# EAGLE board 1-voice(3_3) (EAGLE 9.2.1)
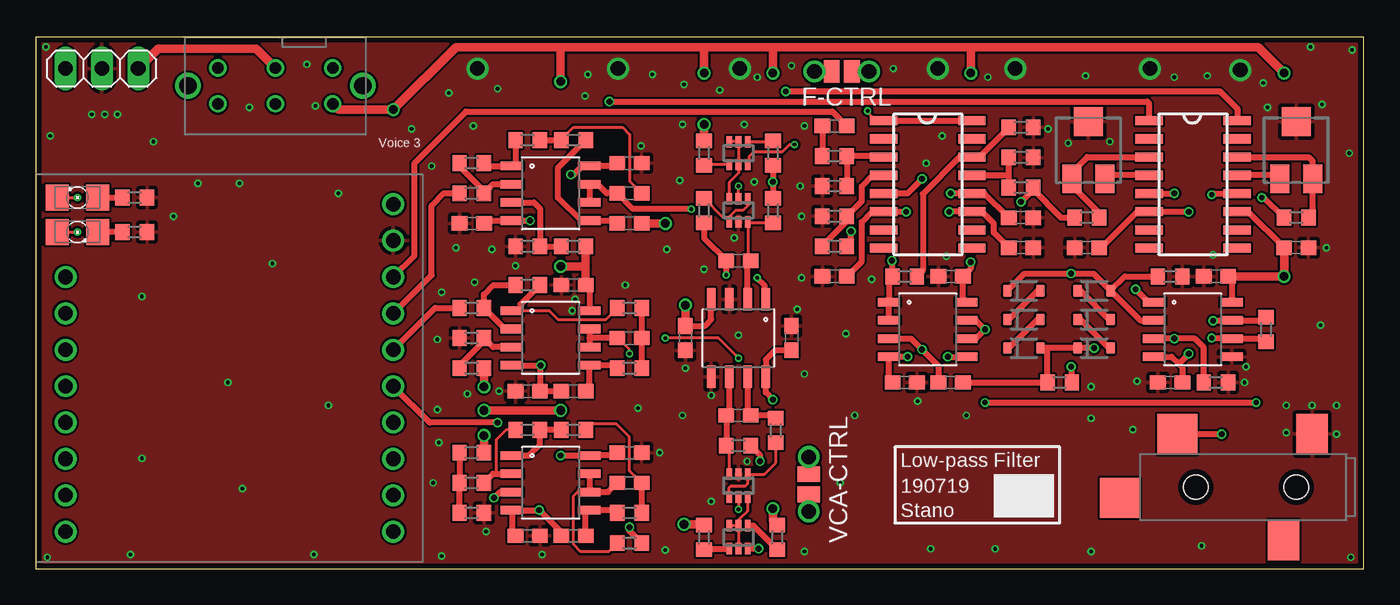
[diagram p0: board, top side]
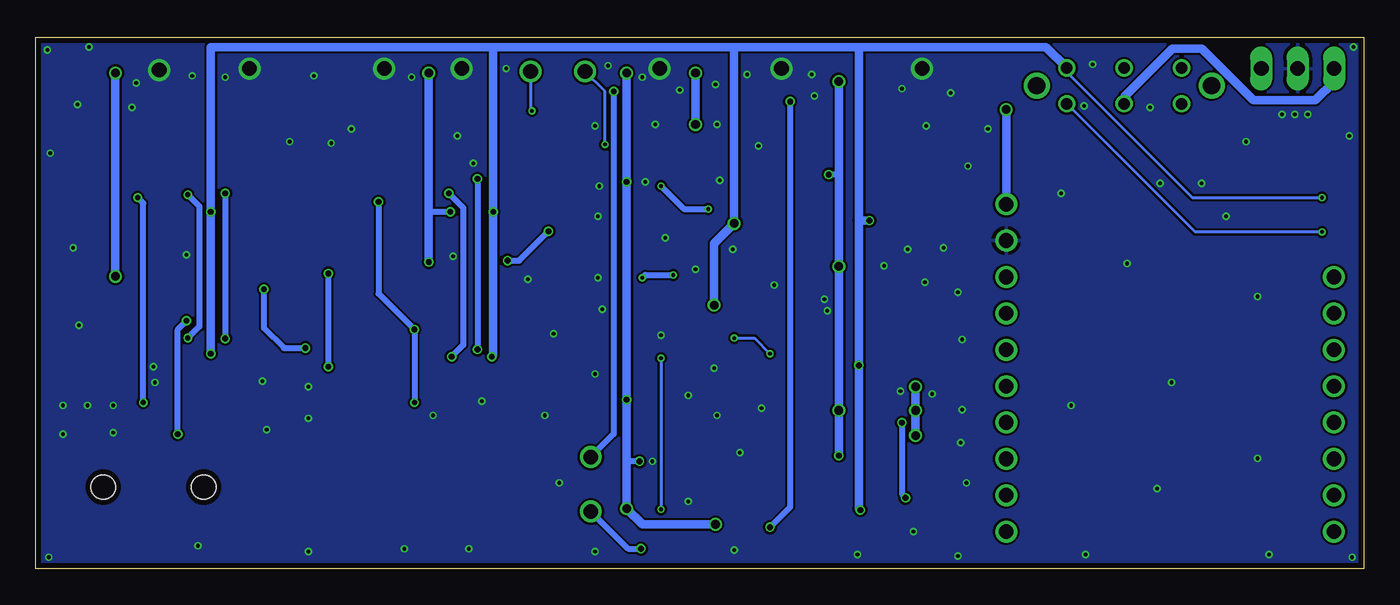
[diagram p1: board, bottom side, seen from below]

Size 92.6 x 37.1 mm. Coordinates in mm from the lower left corner, seen from the top.
Outline: 92.6,37.1 0,37.1 0,0 92.6,0 92.6,37.1
Copper layers (1*16): Top 0.035559375mm / dielectric 1.6mm / Bottom 0.035559375mm
Design rules "oshpark-2layer *": minimum track width 6mil, minimum drill 10mil, track to track 6mil, track to pad 6mil, pad to pad 6mil, via to via 6mil, smd to smd 6mil, copper to edge 15mil, drill to drill 6mil, minimum pad ring 5mil, minimum via ring 5mil, stop-mask expansion 2.5mil, vias tented up to drill 0.6mm, thermal gap 10mil

## Footprints (pad centres in the part's own frame; a part is rotated, then mirrored left to right if it is on the bottom)
C0603 = smd 1.1 x 1: 1 -0.85,0; 2 0.85,0
SOD-323 = smd 0.63 x 0.83: 1 -1.15,0; 2 1.15,0
1X03 = drill 1.016 long: 1 -2.54,0; 2 0,0; 3 2.54,0
TRS = smd 2.2 x 2.8: P$1 2.4,-3.7; P$3 4.4,3.7 | smd 2.8 x 2.8: P$2 11.8,-3.7; P$4 15.8,0.75 | hole 1.7: 3.5,0; 10.5,0
1206 = smd 1.6 x 1.803: A -1.422,0; C 1.422,0
SOT-363-JBLMASK = smd 0.4 x 0.8: 1 -0.65,-0.8; 2 0,-0.8; 3 0.65,-0.8; 4 0.65,0.8; 5 0,0.8; 6 -0.65,0.8
R0603 = smd 1 x 1.1: 1 -0.85,0; 2 0.85,0
DPDT = drill 0.8: P$1 -4,-1.25; P$2 0,-1.25; P$3 4,-1.25; P$4 -4,1.25; P$5 0,1.25; P$6 4,1.25 | drill 1.2: P$7 -6.1,0; P$8 6.1,0
SOIC8 = smd 0.6 x 1.55: P$1 -1.905,-2.7; P$2 -0.635,-2.7; P$3 0.635,-2.7; P$4 1.905,-2.7; P$5 1.905,2.7; P$6 0.635,2.7; P$7 -0.635,2.7; P$8 -1.905,2.7
DMP16 = smd 1.91 x 0.64: 1 -6.47,9.145; 2 -6.47,7.875; 3 -6.47,6.605; 4 -6.47,5.335; 5 -6.47,4.065; 6 -6.47,2.795; 7 -6.47,1.525; 8 -6.47,0.255; 9 -0.33,0.255; 10 -0.33,1.525; 11 -0.33,2.795; 12 -0.33,4.065; 13 -0.33,5.335; 14 -0.33,6.605; 15 -0.33,7.875; 16 -0.33,9.145
CV_MODULE = drill 1.02: CV1-1 2.07,7.17; CV1-2 2.07,17.32; CV1-3 24.93,7.17; CV1-4 24.93,17.32; CV2-1 2.07,4.63; CV2-2 2.07,14.78; CV2-3 24.93,4.63; CV2-4 24.93,14.78; CV3-1 2.07,2.09; CV3-2 2.07,12.24; CV3-3 24.93,2.09; CV3-4 24.93,12.24; GND 24.93,22.4; OSC-1 2.07,9.71; OSC-2 2.07,19.86; OSC-3 24.93,9.71; OSC-4 24.93,19.86; VCC 24.93,24.94
CURRENT_TESTPOINT = drill 1.02: P1 -1.9,0; P2 1.9,0 | smd 1.1 x 1.6: P1.1 -0.705,0; P2.1 0.705,0
POT-TRIM-SMD-BOURNS-3314 = smd 1.3 x 2: 1 -1.15,2; 3 1.15,2 | smd 2 x 2: 2 0,-2

## Placement (x,y rotation side)
C1  10p  [C0603]  49,10.7 0 top
C2  10u  [C0603]  55.7,30.9 180 top
C3  1000p  [C0603]  37.5,12.4 180 top
C4  2000p  [C0603]  41.4,16.1 180 top
C5  0.1u  [C0603]  82.3,20.4 0 top
C6  0.1u  [C0603]  79.1,13 180 top
C7  0.1u  [C0603]  34.3,12.4 180 top
C8  0.1u  [C0603]  37.5,19.8 0 top
C18  0.1u  [C0603]  52.7,16.1 270 top
C19  0.1u  [C0603]  45.3,16.1 270 top
C20  10p  [C0603]  49,21.5 180 top
C23  1000p  [C0603]  41.4,24.1 0 top
C24  2000p  [C0603]  41.4,26.2 180 top
C25  0.1u  [C0603]  41.4,28.3 180 top
C26  0.1u  [C0603]  30.4,24.1 180 top
C27  2000p  [C0603]  41.4,6 180 top
C28  1000p  [C0603]  37.5,2.3 180 top
C29  0.1u  [C0603]  87.9,22.4 0 top
C30  0.1u  [C0603]  73.3,22.4 0 top
C31  0.1u  [C0603]  41.4,8.1 180 top
C32  0.1u  [C0603]  34.3,2.3 0 top
C33  0.1u  [C0603]  63.8,20.4 180 top
C34  0.1u  [C0603]  60.6,13 180 top
C35  2000p  [C0603]  63.8,13 0 top
C36  2000p  [C0603]  68.7,24.5 0 top
C37  0.1u  [C0603]  68.7,22.4 0 top
C38  0.1u  [C0603]  55.7,20.4 0 top
D1  1N4148  [SOD-323]  73.8,19.4 0 top
D2  1N4148  [SOD-323]  73.8,17.4 0 top
D3  1N4148  [SOD-323]  73.8,15.4 0 top
D4  1N4148  [SOD-323]  68.9,15.4 0 top
D5  1N4148  [SOD-323]  68.9,17.4 0 top
D6  1N4148  [SOD-323]  68.9,19.4 0 top
JP2  [1X03]  4.6,34.9 180 top
JP7  TRS  [TRS]  91.4,5.7 180 top
LED1  BLUE  [1206]  2.9,23.5 0 top
LED3  YELLOW  [1206]  2.9,25.9 180 top
Q1  BC847BS  [SOT-363-JBLMASK]  49,25 180 top
Q2  BC857BS  [SOT-363-JBLMASK]  49,29 180 top
Q3  BC847BS  [SOT-363-JBLMASK]  49,5.8 180 top
Q4  BC857BS  [SOT-363-JBLMASK]  49,2.2 180 top
R1  3.3k  [R0603]  85.8,16.7 270 top
R2  30k  [R0603]  87.9,24.5 0 top
R3  10k  [R0603]  41.4,14 180 top
R4  10k  [R0603]  41.4,18.2 0 top
R5  10k  [R0603]  34.3,19.8 180 top
R6  165k  [R0603]  30.4,18.2 180 top
R8  1k  [R0603]  46.6,25 90 top
R9  280k  [R0603]  51.4,25 90 top
R10  10k  [R0603]  30.4,28.3 180 top
R11  10k  [R0603]  37.5,29.9 0 top
R12  10k  [R0603]  34.3,29.9 0 top
R13  165k  [R0603]  30.4,26.2 180 top
R14  1k  [R0603]  51.6,9.65 270 top
R15  562  [R0603]  34.3,22.5 180 top
R16  72k  [R0603]  37.5,22.5 180 top
R17  562  [R0603]  30.4,16.1 180 top
R18  72k  [R0603]  30.4,14 180 top
R19  100k  [R0603]  6.9,23.5 180 top
R21  10k  [R0603]  6.9,25.9 180 top
R23  10  [R0603]  46.6,29 90 top
R24  10  [R0603]  51.4,29 270 top
R25  30k  [R0603]  73.3,24.5 180 top
R26  10k  [R0603]  55.7,28.8 0 top
R27  220  [R0603]  55.7,26.7 0 top
R28  562k  [R0603]  49,8.6 0 top
R29  10k  [R0603]  55.7,22.5 0 top
R30  220  [R0603]  55.7,24.6 180 top
R31  10  [R0603]  46.6,2.2 90 top
R32  220  [R0603]  68.7,30.8 0 top
R33  10k  [R0603]  60.6,20.4 0 top
R34  220  [R0603]  68.7,28.7 0 top
R35  10k  [R0603]  68.7,26.6 0 top
R36  3.3k  [R0603]  82.3,13 180 top
R37  10k  [R0603]  71.4,13 180 top
R38  3.3k  [R0603]  79.1,20.4 180 top
R39  100k  [R0603]  34.3,9.7 0 top
R40  14.7k  [R0603]  30.4,6 0 top
R41  1.62k  [R0603]  30.4,3.9 180 top
R42  8.45k  [R0603]  30.4,8.1 0 top
R43  10k  [R0603]  37.5,9.7 0 top
R44  10k  [R0603]  41.4,3.9 180 top
R45  30k  [R0603]  41.4,1.8 180 top
R46  10  [R0603]  51.7,2.2 90 top
SW1  SWITCH-DPDT  [DPDT]  16.7,33.7 180 top
U4  TL072  [SOIC8]  35.9,26.2 270 top
U5  TL072  [SOIC8]  35.9,6 270 top
U6  LM13700  [DMP16]  65.61,22.12 0 top
U7  TL072  [SOIC8]  62.2,16.7 270 top
U8  LM13700  [DMP16]  84.1,22.12 0 top
U9  TL072  [SOIC8]  49,16.1 180 top
U10  TL072  [SOIC8]  35.9,16.1 270 top
U11  TL072  [SOIC8]  80.69,16.7 270 top
U$1  CV_MODULE  [CV_MODULE]  0,0.5 0 top
U$2  CURRENT_TESTPOINT  [CURRENT_TESTPOINT]  56.2,34.7 180 top
U$3  CURRENT_TESTPOINT  [CURRENT_TESTPOINT]  53.9,5.9 270 top
VR1  1k  [POT-TRIM-SMD-BOURNS-3314]  73.4,29.2 180 top
VR2  1k  [POT-TRIM-SMD-BOURNS-3314]  87.9,29.2 180 top

## Library data of the parts
C1-C8 C18-C20 C23-C38 = rcl; SPICEPREFIX: C
D1-D6 U6 U8 VR1 VR2 = LITTLEBITS
JP2 = pinhead
JP7 SW1 U4 U5 U7 U10 U$1-U$3 = synth
LED1 LED3 = led
Q1-Q4 = LITTLEBITS; SPICEPREFIX: Q
R1-R6 R8-R19 R21 R23-R46 = rcl; SPICEPREFIX: R
U9 U11 = synth; SPICEPREFIX: U

## Nets
12V-IN: JP2.3 SW1.P$5
+12V: C5.2 C8.2 C18.2 C25.2 C29.1 C31.2 C33.1 C37.1 LED1.A R9.2 R16.1 R18.1 R23.2 R24.2 R28.2 R31.2 R42.2 R46.2 SW1.P$4 U4.P$8 U5.P$8 U6.11 U7.P$8 U8.11 U9.P$8 U10.P$8 U11.P$8 U$1.VCC
-12V: C3.2 C6.1 C7.1 C19.1 C23.2 C26.1 C28.2 C30.2 C32.1 C34.2 C38.2 LED3.C SW1.P$1 U4.P$4 U5.P$4 U6.6 U7.P$4 U8.6 U9.P$4 U10.P$4 U11.P$4
-12V-IN: JP2.1 SW1.P$2
F0-OUT: R2.1 R25.2 R35.2 U7.P$6 U7.P$7
F-CTRL0: R13.2 U$1.CV1-4
F-CTRL0-EXP: U6.1 U6.16 U$2.P1 U$2.P1.1
F-CTRL0-LIN: C24.2 Q1.2 U4.P$6 U4.P$7
FILT_IN: C2.2 R26.1
GND: C5.1 C6.2 C7.2 C8.1 C18.1 C19.2 C25.1 C26.2 C29.2 C30.1 C31.1 C32.2 C33.2 C34.1 C36.2 C37.2 C38.1 JP2.2 JP7.P$1 Q1.5 Q3.2 R15.2 R17.2 R19.1 R21.1 R27.1 R30.2 R32.2 R34.2 R36.1 R38.1 R41.1 U9.P$3 U9.P$5 U11.P$5 U$1.GND VR1.2 VR2.2
N$1: R10.2 R13.1 U4.P$2
N$2: R1.2 U8.12 U11.P$6
N$3: R2.2 U8.14 VR2.1
N$4: C3.1 R3.2 U10.P$5
N$5: C4.1 R3.1 R4.2
N$6: R4.1 R5.1 U10.P$1
N$7: Q2.6 U$2.P2 U$2.P2.1
N$8: Q4.6 U$3.P2 U$3.P2.1
N$9: Q1.1 Q1.4 R8.2
N$10: C20.2 R8.1 U9.P$1
N$11: C20.1 Q1.6 R9.1 U9.P$2
N$12: C23.1 R11.2 U4.P$5
N$13: Q1.3 Q2.2 Q2.3 Q2.5
N$14: C24.1 R11.1 R12.2
N$15: R10.1 R12.1 U4.P$1
N$16: Q3.1 Q3.4 R14.2
N$17: LED1.C R19.2
N$19: R5.2 R6.1 U10.P$2
N$20: R15.1 R16.2 U4.P$3
N$21: LED3.A R21.2
N$23: Q2.4 R23.1
N$24: Q2.1 R24.1
N$25: C36.1 U6.12 U7.P$5
N$27: R26.2 R27.2 U6.3
N$28: C35.1 U6.5 U7.P$3
N$29: R36.2 U8.5 U11.P$3
N$30: U8.4 VR1.1
N$31: R29.1 R30.1 U6.4
N$32: D1.2 D6.1 R37.1 R38.2 U11.P$2
N$33: C1.2 R14.1 U9.P$7
N$34: C35.2 D3.1 D4.2 R37.2 U11.P$1
N$35: R32.1 R33.2 U6.14
N$36: R34.1 R35.1 U6.13
N$37: D2.1 D3.2
N$38: D1.1 D2.2
N$39: D4.1 D5.2
N$40: D5.1 D6.2
N$41: R40.1 R41.2 R42.1
N$42: R39.1 R40.2 U5.P$2
N$43: R39.2 R43.1 U5.P$1
N$44: C27.1 R43.2 R44.1
N$45: C28.1 R44.2 U5.P$5
N$46: R45.1 U8.1
N$47: U8.13 VR2.3
N$48: C1.1 Q3.3 R28.1 U9.P$6
N$49: R29.2 R33.1 U7.P$1 U7.P$2
N$50: R17.1 R18.2 U10.P$3
N$51: Q3.6 Q4.2 Q4.3 Q4.5
N$53: Q4.4 R31.1
N$54: Q4.1 R46.1
N$55: R25.1 U8.3 VR1.3
OSC0-OUT: C2.1 U$1.OSC-4
Q-CTRL0: U5.P$3 U$1.CV3-4
Q-CTRL0-I: C27.2 R45.2 U5.P$6 U5.P$7
VCA0-EXP: U8.16 U$3.P1 U$3.P1.1
VCA0-LP: C4.2 Q3.5 U10.P$6 U10.P$7
VCA-CTRL0: R6.2 U$1.CV2-4
VCA-OUT0: JP7.P$2 R1.1 U11.P$7

## Tracks (layer width: path | path; a pad name or v marks a point on that pad's centre or on a via)
12V-IN
  Bottom 0.61: JP2.3 2.06,34 3.36,32.7 7.68,32.7 11.28,36.3 13.35,36.3 16.7,32.95 SW1.P$5
+12V  (via drill 0.25, 0.4, 0.6)
  Top 0.203: LED1.A v2.9,23.5
  Top 0.406: C37.1 66.8,23.45 66.8,24.1 65.98,24.91 U6.11 63.72,24.91 v63.7,24.9 | C5.2 83.39,20.16 U11.P$8 | U7.P$8 64.65,18.86 C33.1 65.2,20.95 v65.2,21.4 | C25.2 40.35,28.11 U4.P$8 38.1,28.11 37.5,27.5 v37.3,27.5 | C31.2 40.16,7.91 U5.P$8 v36.6,7.9 | U8.11 84.53,24.91 C29.1 | C8.2 38.6,19.55 U10.P$8 | R24.2 v51.4,27 R9.2 | v51.4,11.8 50.91,12.29 U9.P$8 50.91,14.61 51.55,15.25 C18.2 | R28.2 50.5,7.95 v50.5,7.5
  Top 0.61: 36.6,36.4 46.6,36.4 | 46.6,36.4 51.4,36.4 | 51.4,36.4 65.2,36.4 | SW1.P$4 21.11,32.04 v24.93,32.04 29.29,36.4 36.6,36.4 | 36.6,36.4 v36.6,34 | v36.6,21.1 38.35,21.1 | 38.35,21.1 R16.1 | C8.2 38.35,21.1 | R18.1 v31.25,12.7 | v31.25,9.3 R42.2 | v31.25,11.05 v36.6,11.05 | 51.4,36.4 v51.4,34.59 | v51.4,4.2 51.4,3.35 R46.2 | R31.2 46.55,3.1 v45.2,3.1 | 46.6,36.4 v46.6,34.59 | v46.6,31 R23.2 | 65.2,36.4 v65.2,34.59 | 65.2,36.4 85.24,36.4 v87.05,34.59 | C29.1 v87.05,20.4 C5.2
  Bottom 0.203: v2.9,23.5 11.75,23.5 SW1.P$4
  Bottom 0.406: v50.5,7.5 51.4,7.5 | 36.6,27.4 36.7,27.5 v37.3,27.5 | v63.7,24.9 65.2,24.9
  Bottom 0.61: v36.6,34 36.6,27.4 v36.6,21.1 v36.6,11.05 v36.6,7.9 | U$1.VCC v24.93,32.04 | v31.25,12.7 v31.25,11.05 v31.25,9.3 | v51.4,34.59 v51.4,27 v51.4,11.8 51.4,7.5 v51.4,4.2 50.3,3.1 v45.2,3.1 | v46.6,34.59 v46.6,31 | v65.2,34.59 65.2,24.9 v65.2,21.4 | v87.05,34.59 v87.05,20.4
-12V  (via drill 0.25, 0.4, 0.6)
  Top 0.203: LED3.C v2.9,25.9
  Top 0.406: C38.2 57.6,21.45 57.6,24.2 58.31,24.91 U6.6 60.69,24.91 v60.7,24.9 | U11.P$4 79.2,14.79 79.7,14.3 | C6.1 79.95,14.05 79.7,14.3 | C34.2 59.5,13.25 U7.P$4 v60.8,14.8 | C30.2 74.3,22.4 76.81,24.91 U8.6 80.39,24.91 v80.4,24.9 | C26.1 31.45,24.3 U4.P$4 v34.46,24.3 v34.47,24.3 | C32.1 33.2,2.55 U5.P$4 v35.09,4.09 v35.1,4.1 36.65,2.55 C28.2 | U10.P$4 v35.2,14.2 35.15,14.14 C7.1 C3.2 | C19.1 46.65,16.95 47.09,17.39 U9.P$4 | v80.4,15 79.7,14.3
  Top 0.61: v45.3,18.4 C19.1 | C23.2 v43.9,24.1
  Bottom 0.203: v2.9,25.9 11.95,25.9 20.7,34.65 SW1.P$1
  Bottom 0.406: v35.2,14.2
  Bottom 0.61: SW1.P$1 22.15,36.4 35.2,36.4 | v35.1,4.1 35.2,4.2 v35.2,14.2 35.2,24.3 | 35.2,36.4 43.9,36.4 | 43.9,36.4 60.7,36.4 | 43.9,36.4 v43.9,24.1 45.3,22.7 v45.3,18.4 | 35.2,36.4 35.2,24.3 | v34.47,24.3 35.2,24.3 | 60.7,36.4 v60.7,24.9 60.7,14.9 v60.8,14.8 | 60.7,36.4 80.4,36.4 v80.4,24.9 v80.4,15
-12V-IN
  Top 0.61: JP2.1 8.54,36.3 15.35,36.3 SW1.P$2
F0-OUT  (via drill 0.35, 0.4)
  Top 0.406: v68.7,25.6 69.55,26.45 | 69.55,26.45 R35.2 | 69.55,26.45 71.5,24.5 R25.2 | v66.2,11.6 v85.1,11.6 | R2.1 85.65,25.9 v85.5,25.9 | U7.P$7 65.56,17.34 v66.2,16.7 65.56,16.07 U7.P$6
  Bottom 0.406: v68.7,25.6 68.7,19.2 v66.2,16.7 v66.2,11.6 | v85.1,11.6 85.1,25.5 v85.5,25.9
F-CTRL0
  Top 0.406: R13.2 28.45,26.2 27.6,25.35 27.6,20.49 U$1.CV1-4
F-CTRL0-EXP  (via drill 0.25)
  Top 0.203: U6.1 58.6,31.27 58,31.86 v58,31.95
  Top 0.406: U6.1 U6.16
  Bottom 0.203: U$2.P1 58.1,32.05 v58,31.95
F-CTRL0-LIN  (via drill 0.25)
  Top 0.203: Q1.2 v49,26.7
  Top 0.406: U4.P$6 U4.P$7 38.66,26.9 39.1,26.9 39.8,26.2 C24.2 41.65,25.1 v45.7,25.1
  Bottom 0.406: v49,26.7 47.4,25.1 v45.7,25.1
FILT_IN
  Top 0.406: C2.2 R26.1
GND  (via drill 0.25, 1.02)
  other vias: 37.6,18.8 37.4,18 0.7,36.4 1,30.2 7.4,19 7.4,7.7 14.4,5.6 13.4,13 16.5,21.3 21.1,26.2 20.4,11.4 0.8,0.8 6.6,1 19.4,1 28.3,0.9 35.3,1 31.4,2.6 27.7,6 28.1,8.8 28,11.1 30.1,12.2 32.3,12.4 28,16 28.3,19.3 30.6,20 29.3,22.4 31.8,22.3 33.45,21.15 43.9,1.3 47.1,4.7 43.5,8.1 42,11.2 45.1,10.7 47.1,12.1 45.3,14 41.1,19.8 44,22.3 46.6,20.9 44.9,27.1 42.2,29.5 45.1,31 30.5,30.9 27.6,28.1 26.2,30.7 3.9,31.7 4.8,31.7 5.7,31.7 38.5,34.5 28.8,33.2 32.2,33.5 38.3,33 43,34.5 49,16.3 49.6,7.5 49.4,31 50.1,27 53.6,30.9 53.3,26.7 48.7,23.1 53.4,24.6 53.4,20.3 53.1,18.1 56.5,16.4 53.6,13.6 56.1,6 53.6,1.2 57.1,10.7 62.4,1.4 73.6,10.5 61.5,11.7 64.9,10.7 66.9,1.4 45.2,33.8 47.7,33.4 50.3,34.3 52.7,35.1 59.8,34.9 66.4,34.3 58.3,20.2 63.2,30.2 62.1,28.3 63.5,21.8 73.2,34.4 79.4,34.3 81.7,34.4 85.6,33.9 85.9,32.2 89.7,32.4 88.9,36.4 91.8,36.2 91.6,29 90,22.4 82.1,21.9 89.6,17 90.7,11.4 90.7,9.4 89,11.4 87.2,11.4 87.2,9.5 81.3,1.6 91.7,0.8 73.6,1.2 76.5,9.7 73.6,12.7 76.8,13.1 84.3,13 84.4,14.1 72,29.7 74.9,29.8 70.6,30.7 8.2,29.8 11.3,26.9 14.9,32.2 18.9,35.2 9.6,24.6 14.2,26.9 19.5,32.3 30.8,34.9 40.6,34.9 49.1,34.9 62.9,34.9 68.3,34.9 77.7,34.9 84,34.8
  pour Top: 0,0 0,37.1 92.6,37.1 92.6,0
  pour Bottom: 0,0 0,37.1 92.6,37.1 92.6,0
N$1
  Top 0.406: R13.1 31.32,26.27 | 31.32,26.27 31.89,26.84 U4.P$2 | R10.2 29.55,28.05 31.32,26.27
N$2  (via drill 0.35)
  Top 0.406: R1.2 85.58,16.07 U11.P$6 82.03,16.07 v82,16.1 | v82,26.1 82.08,26.18 U8.12
  Bottom 0.406: v82,16.1 81.2,16.9 81.2,25.3 v82,26.1
N$3
  Top 0.406: U8.14 83.8,28.7 88.8,28.7 89.05,28.45 VR2.1 89.05,24.8 R2.2
N$4
  Top 0.406: R3.2 40.16,14.2 U10.P$5 38.6,12.65 C3.1
N$5
  Top 0.406: R3.1 C4.1 R4.2
N$6
  Top 0.203: U10.P$1 33.8,18 35.8,18 36.41,17.4 39.75,17.4 R4.1
  Top 0.406: R5.1 33.8,18.45 33.8,18
N$7  (via drill 0.25)
  Top 0.203: Q2.6 49.75,28.3 49.75,28.75 50.1,29.1 52.05,29.1 52.56,29.6 v52.91,29.6 | U$2.P2 U$2.P2.1
  Bottom 0.203: v52.91,29.6 52.91,33.31 U$2.P2
N$8  (via drill 0.4)
  Top 0.203: U$3.P2 U$3.P2.1
  Top 0.406: v50.4,1.4 Q4.6
  Bottom 0.406: U$3.P2 51.3,1.4 v50.4,1.4
N$9
  Top 0.203: Q1.4 48.35,24.55 | 48.35,24.55 48.8,25 49.3,25 49.65,25.35 Q1.1 | R8.2 47.9,24.55 48.35,24.55
N$10  (via drill 0.25)
  Top 0.406: R8.1 46.6,23.05 C20.2 v48.15,20.5 | U9.P$1 50.8,18.9 50.8,19.8 v50.3,20.3
  Bottom 0.406: v50.3,20.3 50.1,20.5 v48.15,20.5
N$11
  Top 0.203: R9.1 49.7,24.15 Q1.6 49.65,21.7 C20.1
  Top 0.406: U9.P$2 49.63,21.29 C20.1
N$12
  Top 0.406: R11.2 36.4,27.95 36.4,25.9 38.01,24.3 U4.P$5 40.35,24.3 C23.1
N$13
  Top 0.203: Q2.3 Q2.2 Q2.5 49,27.6 48.35,26.95 Q1.3
N$14
  Top 0.203: R11.1 36.65,29.95 37.5,30.8 40.9,30.8 41.4,30.3 41.4,27.05 C24.1
  Top 0.406: R12.2 R11.1
N$15
  Top 0.406: R12.1 33.45,28.11 U4.P$1 31.45,28.1 R10.1
N$16
  Top 0.203: Q3.4 48.35,5.65 48.5,5.8 49.5,5.8 49.65,5.95 Q3.1 50.8,6.6 51.6,7.4 R14.2
N$17
  Top 0.406: R19.2 LED1.C
N$19
  Top 0.406: U10.P$2 32.72,16.73 R6.1 31.25,19.15 31.9,19.8 R5.2
N$20
  Top 0.406: U4.P$3 34.73,25.57 35.15,25.15 R15.1 R16.2
N$21
  Top 0.406: LED3.A R21.2
N$23
  Top 0.203: Q2.4 46.65,28.2 R23.1
N$24
  Top 0.203: Q2.1 51.35,29.8
  Top 0.406: 51.35,29.8 R24.1
N$25  (via drill 0.4)
  Top 0.406: C36.1 66.17,26.18 U6.12 63.81,26.18 v63.8,26.2 | v63.6,14.8 v63.6,14.79 U7.P$5
  Bottom 0.406: v63.8,26.2 62.8,25.2 62.8,15.6 v63.6,14.8
N$27
  Top 0.406: R27.2 R26.2 59.06,28.8 U6.3
N$28  (via drill 0.4)
  Top 0.406: U7.P$3 61.03,16.07 v61.8,15.3 62.95,14.15 C35.1 | v61.8,27.2 60.78,26.18 U6.5
  Bottom 0.406: v61.8,27.2 v61.8,15.3
N$29  (via drill 0.4)
  Top 0.406: R36.2 81.45,15.45 80.83,16.07 v79.4,16.07 U11.P$3 | U8.5 79.39,26.18 v79.4,26.2
  Bottom 0.406: v79.4,26.2 v79.4,16.07
N$30
  Top 0.406: U8.4 74.81,27.45 VR1.1
N$31
  Top 0.203: U6.4 59,27.45
  Top 0.406: R29.1 54.85,22.55 56.55,24.25 R30.1 57.6,25.65 57.6,26.7 58.35,27.45 59,27.45
N$32  (via drill 0.4)
  Top 0.406: R37.1 72.25,14.05 v72.2,14.1 | D1.2 73.75,20.6 v72.2,20.6 68.95,20.6 D6.1 | D1.2 75.95,20.4 R38.2 | D1.2 77.02,17.34 U11.P$2
  Bottom 0.406: v72.2,20.6 v72.2,14.1
N$33
  Top 0.406: U9.P$7 49.63,11.06 49.85,10.85 C1.2 51.4,10.7 R14.1
N$34  (via drill 0.4)
  Top 0.406: v73.8,15.4 D3.1 D4.2 70.55,15.38 R37.2 C35.2 | U11.P$1 77.59,18.61 v76.7,19.5
  Bottom 0.406: v76.7,19.5 76.7,16.8 75.3,15.4 v73.8,15.4
N$35
  Top 0.203: U6.14 65.3,28.73
  Top 0.406: 65.3,28.73 64.42,28.73 61.85,26.15 61.85,20.8 R33.2 | R32.1 67.85,30.79 65.79,28.73 U6.14
N$36
  Top 0.406: U6.13 67.75,27.45 67.85,27.55 | 67.85,27.55 R34.1 | R35.1 67.85,27.55
N$37
  Top 0.406: D2.1 72.85,17.4 74.95,15.3 D3.2
N$38
  Top 0.406: D1.1 72.85,19.4 74.95,17.3 D2.2
N$39
  Top 0.406: D5.2 69.85,17.4 67.85,15.4 D4.1
N$40
  Top 0.406: D5.1 67.85,17.4 69.95,19.5 D6.2
N$41
  Top 0.406: R42.1 R40.1 R41.2
N$42
  Top 0.203: R39.1 32.8,9.7 32.1,9 32.1,6.63
  Top 0.406: R40.2 31.89,6.63 32.1,6.63 U5.P$2
N$43
  Top 0.406: U5.P$1 34.41,7.91 35.15,8.65 R39.2 R43.1
N$44
  Top 0.203: C27.1 41.4,6.85 41.4,9.2 40.5,10.1 38.75,10.1 R43.2
  Top 0.406: C27.1 R44.1
N$45
  Top 0.406: C28.1 38.35,3.85 U5.P$5 40.16,4.09 R44.2
N$46  (via drill 0.4)
  Top 0.406: v41.4,2.9 41.4,2.65 R45.1 | U8.1 77.63,32.47 77.5,32.6 v40,32.6
  Bottom 0.406: v40,32.6 40,4.3 v41.4,2.9
N$47
  Top 0.406: VR2.3 86.5,27.45 U8.13
N$48
  Top 0.203: R28.1 48.35,8.4 Q3.3
  Top 0.406: U9.P$6 48.37,10.91 C1.1 R28.1
N$49  (via drill 0.4)
  Top 0.406: U7.P$2 U7.P$1 59.5,20.15 R33.1 59.7,20.45 v59.7,21.5 | R29.2 56.85,22.8 v56.85,23.55
  Bottom 0.406: v59.7,21.5 58.9,21.5 v56.85,23.55
N$50
  Top 0.406: U10.P$3 31.9,15.46 31.57,15.8 31.25,15.8 R17.1 31.25,15.9 29.55,14.2 R18.2
N$51
  Top 0.203: Q4.2 Q4.5 | Q4.2 Q4.3 | Q4.2 49,3.4 49.65,4.05 Q3.6
N$53
  Top 0.406: R31.1 46.65,1.4 Q4.4
N$54
  Top 0.406: R46.1 50.05,3 Q4.1
N$55
  Top 0.406: R25.1 74.15,24.85 72.25,26.75 VR1.3 72.25,27.65 73.33,28.73 U8.3
OSC0-OUT
  Top 0.406: U$1.OSC-4 26.4,21.83 26.4,28.3 30,31.9 55.55,31.9 C2.1
Q-CTRL0  (via drill 0.4)
  Top 0.406: U$1.CV3-4 27.47,10.2 v32.2,10.2 | v31.95,4.95 32.37,5.37 U5.P$3
  Bottom 0.406: v32.2,10.2 32.2,5.2 v31.95,4.95
Q-CTRL0-I
  Top 0.203: U5.P$6 37.77,5.37 37.5,5.1 37.5,1.7 38,1.2 39.95,1.2 R45.2
  Top 0.406: C27.2 39.91,5.37 U5.P$6 U5.P$7
VCA0-EXP  (via drill 0.4)
  Top 0.406: v52.3,33.3 82.6,33.3 83.8,32.1 83.8,31.3 U8.16
  Bottom 0.406: U$3.P1 52.3,9.4 v52.3,33.3
VCA0-LP  (via drill 0.25)
  Top 0.203: Q3.5 v49,4.15 | v49,14.7 47.6,16.1 v43.9,16.1 | v41.4,15 41.4,15.3 40.6,16.1 C4.2
  Top 0.406: U10.P$7 38.6,16.1 | 38.6,16.1 U10.P$6 | C4.2 38.6,16.1
  Bottom 0.203: v43.9,16.1 42.5,16.1 v41.4,15 | v49,14.7 v49,4.15
VCA-CTRL0
  Top 0.406: U$1.CV2-4 27.85,18.2 R6.2
VCA-OUT0  (via drill 0.4)
  Top 0.406: R1.1 85.58,17.34 U11.P$7 82.14,17.34 v82.1,17.3 | JP7.P$2 v82.7,9.4
  Bottom 0.406: v82.7,9.4 82.7,16.7 v82.1,17.3

## Text on the board
tPlace: F-CTRL | Voice 3 | Low-pass Filter | 190719 | Stano | VCA-CTRL